# Altium PCB CAN-to-CAN.PcbDoc
Units mil, origin at the board's own origin, x right, y up, seen from the top; angles counter-clockwise.
Board outline 3270.03 x 2790.03 mil, 2 copper layers (Top Layer, Bottom Layer); 112 components, 87 nets, 366 pads, 76 vias.
Unrouted connection lines stored in the file: 33.
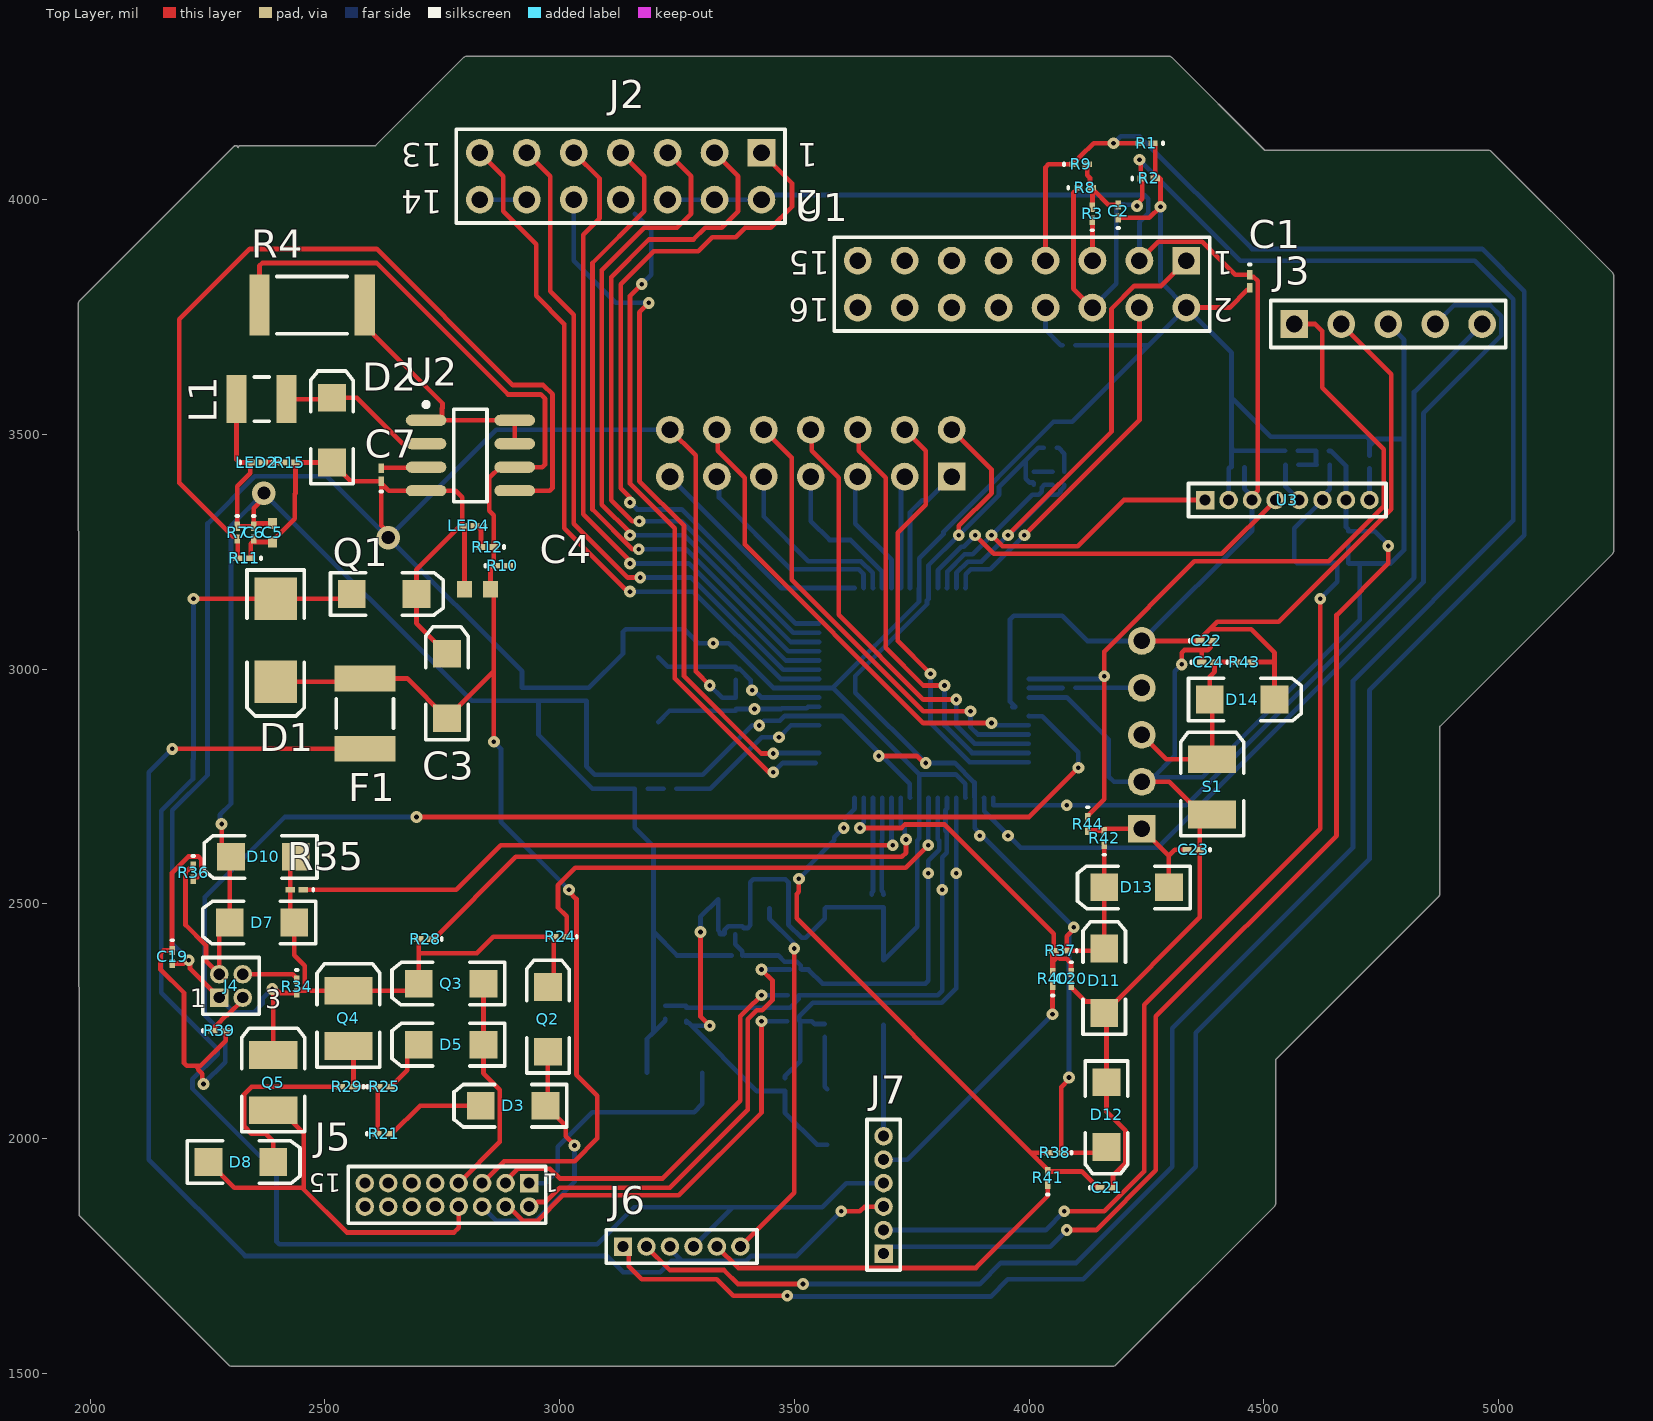
[diagram p0: Top Layer view]
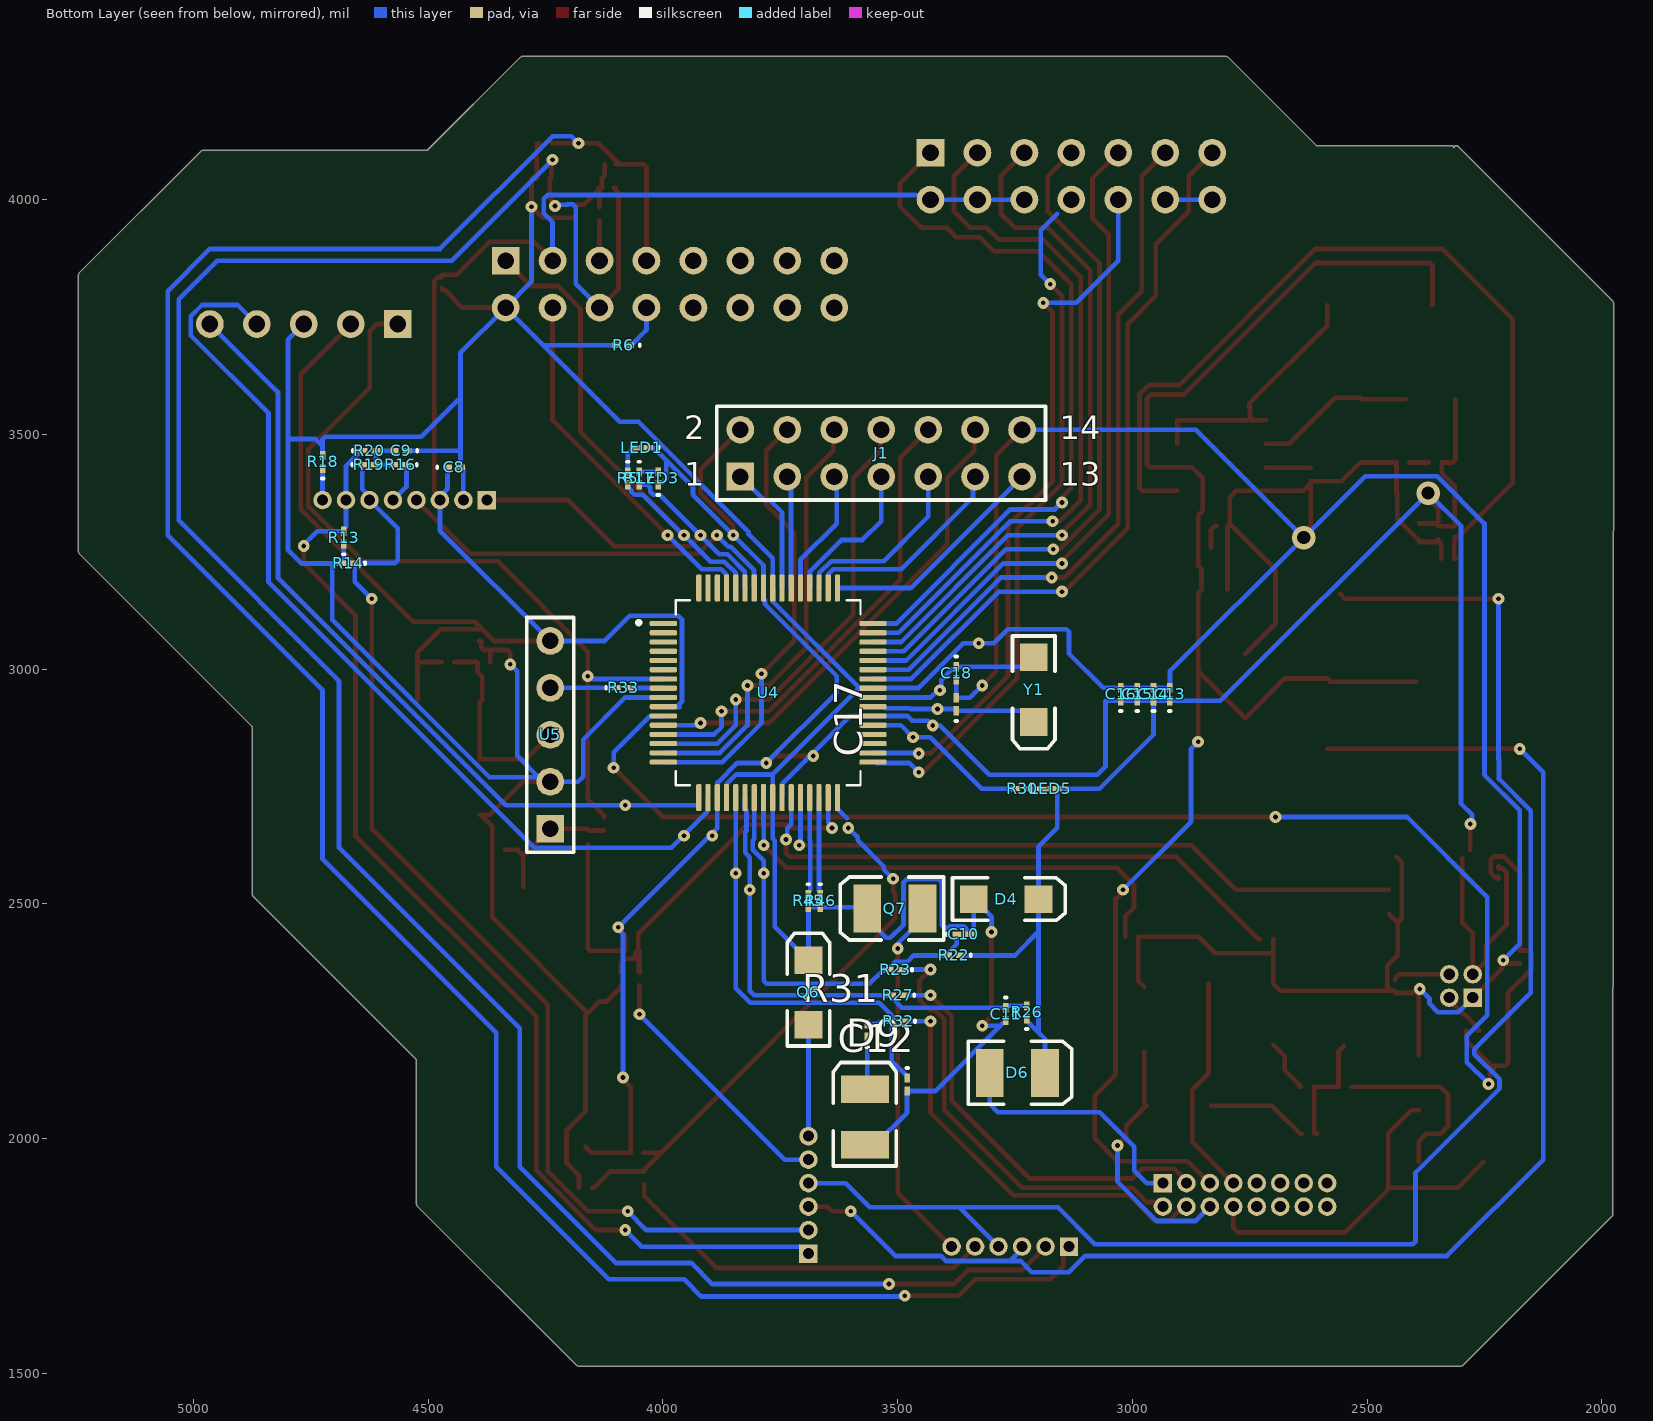
[diagram p1: Bottom Layer view, seen from below]

## Layer stack, top to bottom
Top Solder: solder mask 0.4, Solder Resist, Dk 3.5
Top Layer: signal copper 1.4
Dielectric 1: dielectric 12.6, FR-4, Dk 4.8
Bottom Layer: signal copper 1.4
Bottom Solder: solder mask 0.4, Solder Resist, Dk 3.5

## Board outline
1976.45,1836.45 2296.45,1516.45 2300,1514.98 4180,1514.98 4183.55,1516.45 4523.55,1856.45 4525.02,1860 4525.02,2167.92 4873.55,2516.45 4875.02,2520 4875.02,2877.92 5243.55,3246.45 5245.02,3250 5245.02,3840 5243.55,3843.55 4983.55,4103.55 4980,4105.02 4502.08,4105.02 4303.55,4303.55 4300,4305.02 2800,4305.02 2796.45,4303.55 2607.92,4115.02 2320,4115.02 ccw(c2320,4110) 2315,4110.39 ccw(c2310,4110) 2306.45,4113.55 1976.45,3783.55 1974.98,3780

## Design rules (kind name [scope] priority, off if disabled: settings)
Clearance [All] p1: gap=6 ignorepadtopadclearanceinfootprint=TRUE except(0: Arc-Hole Track-Hole SMDPad-Hole THPad-Hole Via-Hole Fill-Hole Poly-Hole Region-Hole Text-Hole)
PolygonConnect [All] p1: connectstyle=Relief reliefconductorwidth=10 reliefentries=4 polygonreliefangle="90 Angle" airgapwidth=10
RoutingVias [All] p1: holewidth=28 width=50 viastyle="Through Hole" minholewidth=28 minwidth=50 maxholewidth=28 maxwidth=50
SolderMaskExpansion [All] p1: expansion=4 istentingtop=FALSE
Width [All] p1: maxlimit=10 minlimit=10 preferedwidth=10
30 further rules are at their usual default settings.

## Components (designator, comment, footprint, x,y, rotation, side; value= is the part's Value field where it differs from the comment)
C1 "100n" 0603 4470,3826.22 r270 top
C2 "4n7" 0603 4190,3975 r90 top value=100n
C3 "100n" 3.2X1.6X1.1 2760,2963.9 r90 top
C4 "10u/16" 1608[0603] 2825,3170 r180 top value=470u/16
C5 "100u/6V3" 0402 2388.35,3290.32 r270 top value=470u/16
C6 "100n" 0603 2348.35,3290.63 r270 top
C7 "100p" 0603 2620,3413.78 r90 top value=100pF
C8 "100n" 0603 4445,3430 r180 bottom
C9 "4n7" 0603 4558.78,3465 r0 bottom value=100n
C10 "100n" 0603 3360,2435 r180 bottom
C11 "100n" 0603 3270,2265 r270 bottom
C12 "100n" 0603 3480,2115 r270 bottom
C13 "100n" 0603 2920,2946.22 r90 bottom
C14 "100n" 0603 2955,2946.22 r90 bottom
C15 "100n" 0603 2990,2946.22 r90 bottom
C16 "100n" 0603 3025,2946.22 r90 bottom
C17 "27p" 0603 3375,2925 r90 bottom value=100n
C18 "27p" 0603 3375,2991.22 r270 bottom value=100n
C19 "100n" 0603 2174.51,2386.71 r270 top
C20 "100n" 0603 4090,2340 r270 top
C21 "100n" 0603 4165,1895 r0 top
C22 "100n" 0603 4377.8,3060 r0 top
C23 "100n" 0603 4350,2615 r180 top
C24 "10n" 0603 4381.57,3015 r0 top value=100pF
D1 "P6SMB15A" SMB 2395,3061.42 r270 top
D2 "LL5817" 3.2X1.6X1.1 2515,3508.9 r90 top
D3 "LL4148" 3.2X1.6X1.1 2901.1,2070 r180 top
D4 "BAT54S" 3.2X1.6X1.1 3268.9,2510 r180 bottom
D5 "LL4148" 3.2X1.6X1.1 2768.9,2200 r180 top
D6 "BAT54S" 3.5X2.8X1.9 3245,2140 r180 bottom
D7 "BAT54S" 3.2X1.6X1.1 2366.1,2460 r180 top
D8 "LL4148" 3.2X1.6X1.1 2321.1,1950 r0 top
D9 "BAT54S" 3.5X2.8X1.9 3570,2045.94 r90 bottom
D10 "BAT54S" 3.2X1.6X1.1 2368.9,2600 r180 top
D11 "BAT54S" 3.2X1.6X1.1 4160,2336.1 r90 top
D12 "BAT54S" 3.2X1.6X1.1 4165,2051.1 r270 top
D13 "LL4148" 3.2X1.6X1.1 4228.9,2535 r180 top
D14 "LL4448" 3.2X1.6X1.1 4453.9,2935 r0 top
F1 "Fuse 1" 1812 2585,2905.2 r90 top
J1 "Header 7X2" HDR2X7 3835,3410 r180 bottom
J2 "Header 7X2" HDR2X7 3430,4100 r180 top
J3 "ZL201" HDR1X5 4565,3735 r0 top
J4 "MX-43045-0400" MHDR2X2 2275,2300 r0 top
J5 "MX-43045-0800" MHDR2X8 2935,1905 r180 top
J6 "MX-43045-0600" MHDR1X6 3135,1770 r0 top
J7 "MX-43045-0600" MHDR1X6 3690,1755 r90 top
L1 "DL22-330" 14-1210 2365,3575 r180 top value=100uH
LED1 "HCL-1904AYL" 0603 4045,3471.22 r0 bottom
LED2 "HCL-1903BG4" 0603 2355,3440 r0 top
LED3 "HCL-1906BR1" 0603 4010,3406.22 r90 bottom
LED4 "HCL-1904AYL" 0603 2806.22,3305 r180 top
LED5 "HCL-1906BR1" 0603 3173.78,2745 r0 bottom
Q1 "BSS138" 3.2X1.6X1.1 2626.1,3160 r0 top
Q2 "BSS123" 3.2X1.6X1.1 2975,2253.9 r90 top
Q3 "BSS123" 3.2X1.6X1.1 2768.9,2330 r180 top
Q4 "BSS123" 3.5X2.8X1.9 2550,2255.94 r90 top
Q5 "BSS123" 3.5X2.8X1.9 2390,2119.06 r90 top
Q6 "BSS123" 3.2X1.6X1.1 3690,2311.1 r90 bottom
Q7 "BSS123" 3.5X2.8X1.9 3505.94,2490 r0 bottom
R1 "CAN0001" 0603 4250,4120 r180 top
R2 "CAN0001" 0603 4255,4045 r0 top
R3 "nc" 0603 4135,3970 r90 top value=1K
R4 "1R" RESC6332 2472.8,3775 r180 top value=1K
R5 "4k7" 0603 4075,3406.22 r270 bottom value=1K
R6 "1k" 0603 4085,3690 r0 bottom value=1K
R7 "3k6 1%" 0603 2313.35,3290.63 r270 top value=1K
R8 "68" 0603 4118.78,4025 r0 top value=1K
R9 "68" 0603 4110,4075 r0 top value=1K
R10 "1M" 0603 2877.44,3220 r0 top value=1K
R11 "1k2 1%" 0603 2328.35,3235.63 r180 top value=1K
R12 "4k7" 0603 2846.22,3260 r180 top value=1K
R13 "CAN0001" 0603 4680,3280 r90 bottom
R14 "CAN0001" 0603 4670,3225 r0 bottom
R15 "1k8" 0603 2423.78,3440 r0 top value=1K
R16 "nc" 0603 4560,3435 r0 bottom value=1K
R17 "4k7" 0603 4050,3406.22 r270 bottom value=1K
R18 "1k" 0603 4725,3441.22 r90 bottom value=1K
R19 "68" 0603 4626.38,3435 r180 bottom value=1K
R20 "68" 0603 4625,3465 r180 bottom value=1K
R21 "10k" 0603 2625,2010 r0 top value=1K
R22 "10k" 0603 3380,2390 r0 bottom value=1K
R23 "1k" 0603 3505,2360 r0 bottom value=1K
R24 "4k7" 0603 3001.22,2430 r180 top value=1K
R25 "10k" 0603 2626.22,2110 r0 top value=1K
R26 "10k" 0603 3225,2268.78 r90 bottom value=1K
R27 "1k" 0603 3499.84,2305 r0 bottom value=1K
R28 "4k7" 0603 2713.78,2425 r180 top value=1K
R29 "10k" 0603 2546.97,2110 r180 top value=1K
R30 "1k8" 0603 3235,2745 r0 bottom value=1K
R31 "10k" 0603 3565,2230 r90 bottom value=1K
R32 "1k" 0603 3498.62,2250 r0 bottom value=1K
R33 "nc" 0603 4085,2960 r180 bottom value=1K
R34 "4k7" 0603 2440,2323.78 r270 top value=1K
R35 "4k7" 0603 2440,2530 r180 top value=1K
R36 "10k" 0603 2220,2566.22 r270 top value=1K
R37 "10k" 0603 4066.22,2400 r180 top value=1K
R38 "10k" 0603 4055,1970 r180 top value=1K
R39 "470" 0603 2275,2230 r0 top value=1K
R40 "1k" 0603 4050,2340 r90 top value=1K
R41 "1k" 0603 4040,1916.22 r90 top value=1K
R42 "4k7" 0603 4160,2640 r90 top value=1K
R43 "10k" 0603 4457.8,3015 r0 top value=1K
R44 "4k7" 0603 4125,2670 r270 top value=1K
R45 "4k7" 0603 3690,2506.22 r270 bottom value=1K
R46 "4k7" 0603 3665,2506.22 r270 bottom value=1K
S1 "DTSM32NB" 3.5X2.8X1.9 4390,2749.06 r90 top
U1 "MCP2551-I/SN" HDR2X8 4335,3870 r180 top
U2 "MC33063AD" SO8_N 2810,3455 r0 top
U3 "MCP2551-I/SN" MHDR1X8 4375,3360 r0 top
U4 "PIC30F5011" QFP50P1200X1200X120-64N 3775.86,2949.39 r180 bottom
U5 "MCP1320-46LT" HDR1X5 4240,2660 r90 bottom
Y1 "10MHz" 3.2X1.6X1.1 3210,2956.1 r270 bottom

## Footprints (in the part's own frame and the unit in brackets; to place one, negate y for a bottom-side part, rotate by r counter-clockwise, add the part's x,y. Pads: shape width x height; smd on the part's side, far side on the other; paste and mask are expansions set on the pad)
3.2X1.6X1.1 [mm] "SMT LED; 2 Flat Leads"
  rect 1.5x1.5 smd: 1(-1.75,0) 2(1.75,0)
  silkscreen extent -2.9,-1.15 3.2,1.15
3.5X2.8X1.9 [mm] "SM LED; 2 C-Bend Leads; Body 3.5 x 2.8 x 1.9 mm, inc leads (LxWxH typ)"
  rect 1.5x2.6 smd: 1(-1.5,0) 2(1.5,0)
  silkscreen extent -2.65,-1.7 2.95,1.7
14-1210 [mm] "Chip Resistor, Body 3.2x2.5mm, IPC High Density"
  rect 1.1x2.6 smd: 1(-1.35,0) 2(1.35,0)
  silkscreen extent -0.4,-1.2 0.4,1.2, body extent -1.68,-1.32 1.68,1.32, height 0.9
0402 [mm] "Chip Capacitor, Body 1.0x0.5mm, IPC High Density"
  rect 0.6x0.5 smd: 1(-0.5,0) 2(0.5,0)
  body extent -0.55,-0.3 0.55,0.3, height 1.3
0603 [mm] "Chip Inductor, Body 0.6x0.3mm, IPC High Density"
  rect 0.5x0.3 smd: 1(-0.35,0) 2(0.35,0)
  silkscreen extent -0.9,-0.05 -0.9,0.05, body extent -0.33,-0.18 0.33,0.18, height 0.55
1608[0603] [mm] "Chip Capacitor, Body 1.6x0.8mm, IPC High Density"
  rect 0.8x0.9 smd: 1(-0.7,0) 2(0.7,0)
  body extent -0.87,-0.48 0.87,0.48, height 1.3
1812 [mm] "Chip Capacitor, Body 4.5x3.2mm, IPC High Density"
  rect 1.4x3.3 smd: 1(-1.9,0) 2(1.9,0)
  silkscreen extent -0.8,-1.55 0.8,1.55, body extent -2.4,-1.7 2.4,1.7, height 1.4
HDR1X5 [mm] "Connector; Header; 5 Position"
  rect 1.5x1.5 hole 0.9: 1(0,0)
  round 1.5 hole 0.9: 2(2.54,0) 3(5.08,0) 4(7.62,0) 5(10.16,0)
  silkscreen extent -1.27,-1.27 11.43,1.27
HDR2X7 [mm] "Connector; Header; 7x2 Position"
  rect 1.5x1.5 hole 0.9: 1(0,0)
  round 1.5 hole 0.9: 2(0,2.54) 3(2.54,0) 4(2.54,2.54) 5(5.08,0) 6(5.08,2.54) 7(7.62,0) 8(7.62,2.54) 9(10.16,0) 10(10.16,2.54) 11(12.7,0) 12(12.7,2.54) 13(15.24,0) 14(15.24,2.54)
  silkscreen extent -1.27,-1.27 16.51,3.81
HDR2X8 [mm] "Connector; Header; 8x2 Position"
  rect 1.5x1.5 hole 0.9: 1(0,0)
  round 1.5 hole 0.9: 2(0,2.54) 3(2.54,0) 4(2.54,2.54) 5(5.08,0) 6(5.08,2.54) 7(7.62,0) 8(7.62,2.54) 9(10.16,0) 10(10.16,2.54) 11(12.7,0) 12(12.7,2.54) 13(15.24,0) 14(15.24,2.54) 15(17.78,0) 16(17.78,2.54)
  silkscreen extent -1.27,-1.27 19.05,3.81
MHDR1X6 [mm] "Connector; Header; 6 Position"
  rect 1x1 hole 0.6: 1(0,0)
  round 1 hole 0.6: 2(1.27,0) 3(2.54,0) 4(3.81,0) 5(5.08,0) 6(6.35,0)
  silkscreen extent -0.9,-0.9 7.25,0.9
MHDR1X8 [mm] "Connector; Header; 8 Position"
  rect 1x1 hole 0.6: 1(0,0)
  round 1 hole 0.6: 2(1.27,0) 3(2.54,0) 4(3.81,0) 5(5.08,0) 6(6.35,0) 7(7.62,0) 8(8.89,0)
  silkscreen extent -0.9,-0.9 9.79,0.9
MHDR2X2 [mm] "Connector; Header; 2x2 Position"
  rect 1x1 hole 0.6: 1(0,0)
  round 1 hole 0.6: 2(0,1.27) 3(1.27,0) 4(1.27,1.27)
  silkscreen extent -0.9,-0.9 2.17,2.17
MHDR2X8 [mm] "Connector; Header; 8x2 Position"
  rect 1x1 hole 0.6: 1(0,0)
  round 1 hole 0.6: 2(0,1.27) 3(1.27,0) 4(1.27,1.27) 5(2.54,0) 6(2.54,1.27) 7(3.81,0) 8(3.81,1.27) 9(5.08,0) 10(5.08,1.27) 11(6.35,0) 12(6.35,1.27) 13(7.62,0) 14(7.62,1.27) 15(8.89,0) 16(8.89,1.27)
  silkscreen extent -0.9,-0.9 9.79,2.17
QFP50P1200X1200X120-64N [mm]
  rrect50% 1.47x0.28 smd: 1(-5.67,3.75) 2(-5.67,3.25) 3(-5.67,2.75) 4(-5.67,2.25) 5(-5.67,1.75) 6(-5.67,1.25) 7(-5.67,0.75) 8(-5.67,0.25) 9(-5.67,-0.25) 10(-5.67,-0.75) 11(-5.67,-1.25) 12(-5.67,-1.75) 13(-5.67,-2.25) 14(-5.67,-2.75) 15(-5.67,-3.25) 16(-5.67,-3.75) 33(5.67,-3.75) 34(5.67,-3.25) 35(5.67,-2.75) 36(5.67,-2.25) 37(5.67,-1.75) 38(5.67,-1.25) 39(5.67,-0.75) 40(5.67,-0.25) 41(5.67,0.25) 42(5.67,0.75) 43(5.67,1.25) 44(5.67,1.75) 45(5.67,2.25) 46(5.67,2.75) 47(5.67,3.25) 48(5.67,3.75)
  rrect50% 0.28x1.47 smd: 17(-3.75,-5.67) 18(-3.25,-5.67) 19(-2.75,-5.67) 20(-2.25,-5.67) 21(-1.75,-5.67) 22(-1.25,-5.67) 23(-0.75,-5.67) 24(-0.25,-5.67) 25(0.25,-5.67) 26(0.75,-5.67) 27(1.25,-5.67) 28(1.75,-5.67) 29(2.25,-5.67) 30(2.75,-5.67) 31(3.25,-5.67) 32(3.75,-5.67) 49(3.75,5.67) 50(3.25,5.67) 51(2.75,5.67) 52(2.25,5.67) 53(1.75,5.67) 54(1.25,5.67) 55(0.75,5.67) 56(0.25,5.67) 57(-0.25,5.67) 58(-0.75,5.67) 59(-1.25,5.67) 60(-1.75,5.67) 61(-2.25,5.67) 62(-2.75,5.67) 63(-3.25,5.67) 64(-3.75,5.67)
  silkscreen extent -7.1,-5 5,5
RESC6332 [mm] "Chip Resistor, Body 6.3x3.2mm, IPC High Density"
  rect 1.1x3.3 smd: 1(-2.85,0) 2(2.85,0)
  silkscreen extent -1.9,-1.55 1.9,1.55, body extent -3.22,-1.68 3.22,1.68, height 0.9
SMB [mm] "DO-214-AA/SMB; 2 C-Bend Leads; Body 5.3 x 3.6 mm, inc. leads (LxW)"
  rect 2.3x2.3 smd: 1(-2.25,0) 2(2.25,0)
  silkscreen extent -3.8,-1.55 4.1,1.55
SO8_N [mm] "SOIC, 8-Leads, Body 4.9x3.9mm, Pitch 1.27mm, IPC Medium Density"
  oval 2.2x0.6 smd: 1(-2.4,1.905) 2(-2.4,0.635) 3(-2.4,-0.635) 4(-2.4,-1.905) 5(2.4,-1.905) 6(2.4,-0.635) 7(2.4,0.635) 8(2.4,1.905)
  silkscreen extent -2.52,-2.5 0.9,2.88, body extent -2,-2.5 2,2.5, height 1.75

## Part data
C1 C2 C3 C6 C7 C8 C9 C10 C11 C12 C13 C14 C15 C16 C17 C18 C19 C20 C21 C22 C23 C24: library part Cap, "Capacitor", LatestRevisionDate=17-Jul-2002, LatestRevisionNote="Re-released for DXP Platform.", PackageReference=RAD-0.3, Published=8-Jun-2000, Publisher="Altium Limited"
C4 C5: library part "Cap Pol1", "Polarized Capacitor (Radial)", LatestRevisionDate=17-Jul-2002, LatestRevisionNote="Re-released for DXP Platform.", PackageReference=RB7.6-15, Published=8-Jun-2000, Publisher="Altium Limited"
D1: library part "D Zener", "Zener Diode", LatestRevisionDate=17-Jul-2002, LatestRevisionNote="Re-released for DXP Platform.", PackageReference=DIODE-0.7, Published=8-Jun-2000, Publisher="Altium Limited"
D2 D3 D5 D8 D13: library part 1N4148, "High Conductance Fast Diode", Code_JEDEC=DO-204-AH, ComponentLink1Description="Manufacturer Link", ComponentLink1URL=http://www.fairchildsemi.com/, ComponentLink2Description=Datasheet, ComponentLink2URL=http://www.fairchildsemi.com/ds/1N%2F1N4148.pdf, DatasheetDocument=1997, LatestRevisionDate=17-Jul-2002, LatestRevisionNote="Re-released for DXP Platform.", PackageReference=DO-35, Published=8-Jun-2000, Publisher="Altium Limited"
D4 D6 D7 D9 D10 D11 D12: "Schottky Barrier Double Diode", ComponentLink1Description="Manufacturer Link", ComponentLink1URL=http://www.semiconductors.philips.com/, ComponentLink2Description=Datasheet, ComponentLink2URL=http://www.semiconductors.philips.com/acrobat/datasheets/BAT54_SERIES_4.pdf, DatasheetVersion=4-Mar-2002, LatestRevisionDate=12-Dec-2006, LatestRevisionNote="IPC-7351 Footprint Added.", PackageDescription="3-Pin SOT-23 Package 0.95 mm Pitch, 2.3 mm Lead Span", PackageReference=SOT23, PackageVersion=May-1999, Published=17-Sep-2003, Publisher="Altium Limited"
D14: library part Diode, "Default Diode", PackageDocument=Sep-1996, Code_JEDEC=DO-214-AB, LatestRevisionDate=17-Jul-2002, LatestRevisionNote="Re-released for DXP Platform.", PackageReference=SMC, Published=8-Jun-2000, Publisher="Altium Limited"
F1: "Fuse", LatestRevisionDate=17-Jul-2002, LatestRevisionNote="Re-released for DXP Platform.", PackageReference=PIN-W2/E2.8, Published=8-Jun-2000, Publisher="Altium Limited"
J1 J2: "Header, 7-Pin, Dual row", LatestRevisionDate=17-Jul-2002, LatestRevisionNote="Re-released for DXP Platform.", Publisher="Altium Limited"
J3: library part CON5, "Connector"
J4: library part "Header 2X2", "Header, 2-Pin, Dual row", LatestRevisionDate=17-Jul-2002, LatestRevisionNote="Re-released for DXP Platform.", Publisher="Altium Limited"
J5: library part "Header 4X2A", "Header, 4-Pin, Dual row", LatestRevisionDate=17-Jul-2002, LatestRevisionNote="Re-released for DXP Platform.", Publisher="Altium Limited"
J6 J7: library part "Header 6", "Header, 6-Pin", LatestRevisionDate=17-Jul-2002, LatestRevisionNote="Re-released for DXP Platform.", Publisher="Altium Limited"
L1: library part "Inductor Iron", "Magnetic-Core Inductor", Published=24-Mar-1999, Publisher="Altium Limited", Revision="July-2002: Re-released for DXP Platform."
LED1 LED2 LED3 LED4 LED5: library part LED3, "Typical BLUE SiC LED", Published=8-Jun-2000, Publisher="Altium Limited", Revision 1="Jul-2002: Re-released for DXP Platform.", Revision 2="17-Dec-2003: PCB Footprint replaced."
Q1: "N-Channel Enhancement Mode Vertical DMOS FET", ComponentLink1Description="Manufacturer Link", ComponentLink1URL=http://www.zetex.com/, ComponentLink2Description=Datasheet, ComponentLink2URL=www.zetex.com/3.0/pdf/BSS138.pdf, DatasheetVersion=Mar-96, PackageDescription="SOT-23; 3 Leads; Body 3.1 x 2.5 mm, inc. leads (LxW max), Alternate Lead Configuration", PackageReference=SOT23, PackageVersion=1996, Published=17-Dec-2003, Publisher="Altium Limited"
Q2 Q3 Q4 Q5 Q6 Q7: "N-channel Enhancement Mode Vertical D-MOSFET", ComponentLink1Description="Manufacturer Link", ComponentLink1URL=http://www.semiconductors.philips.com/, ComponentLink2Description=Datasheet, ComponentLink2URL=http://www.semiconductors.philips.com/acrobat/datasheets/BSS123_3.pdf, DatasheetVersion=Apr-1995, LatestRevisionDate=12-Dec-2006, LatestRevisionNote="IPC-7351 Footprint Added.", PackageDescription="3-Pin SOT-23 Package 0.95 mm Pitch, 2.3 mm Lead Span", PackageReference=SOT23, PackageVersion=May-1999, Published=17-Sep-2003, Publisher="Altium Limited"
R1 R2 R13 R14: library part "Res Varistor", "Varistor (Voltage-Sensitive Resistor)", LatestRevisionDate=04-Mar-2005, LatestRevisionNote="PCB Footprint replaced.", PackageReference=6-0805, Published=24-Mar-1999, Publisher="Altium Limited"
R3 R4 R5 R6 R7 R8 R9 R10 R11 R12 R15 R16 R17 R18 R19 R20 R21 R22 R23 R24 R25 R26 R27 R28 R29 R30 R31 R32 R33 R34 R35 R36 R37 R38 R39 R40 R41 R42 R43 R44 R45 R46: library part Res2, "Resistor", LatestRevisionDate=17-Jul-2002, LatestRevisionNote="Re-released for DXP Platform.", PackageReference=AXIAL-0.4, Published=8-Jun-2000, Publisher="Altium Limited"
S1: library part PUSHB, "Switch PushButton"
U1 U3: "High Speed CAN Transceiver, 8-Pin Plastic SOIC, Industrial Grade", Code_JEDEC=MS-012, ComponentLink1Description="Manufacturer Link", ComponentLink1URL=http://www.microchip.com, ComponentLink2Description=Datasheet, ComponentLink2URL=http://ww1.microchip.com/downloads/en/DeviceDoc/21667d.pdf, DatasheetVersion=Nov-2003, LatestRevisionDate=13-Apr-2006, LatestRevisionNote="IPC-7351 Footprint Added.", PackageDescription="8-Pin Plastic Narrow Body Small Outline Integrated Circuit 1.27 mm Pitch", PackageReference=SOIC150-8, PackageVersion=Oct-2005, Published=6-Oct-2005, Publisher="Altium Limited"
U2: "DC-to-DC Converter Control Circuit", Code_IPC=SOIC127P600-8, Code_JEDEC=MS-012-AA, ComponentLink1Description="Manufacturer Link", ComponentLink1URL=http://www.onsemi.com/site/products/taxonomy/0,4438,503,00.html, ComponentLink2Description=Datasheet, ComponentLink2URL=http://www.onsemi.com/pub/Collateral/MC34063A-D.PDF, DatasheetVersion=1988, LatestRevisionDate=13-Apr-2006, LatestRevisionNote="IPC-7351 Footprint Added.", PackageDescription="8-Pin Small Outline Integrated Circuit 1.27 mm Pitch", PackageReference=751-02, Published=17-Jul-2002, Publisher="Altium Limited"
U4: "PIC30F5011 - Up"
U5: library part MCP1320
Y1: library part XTAL, "Crystal Oscillator", LatestRevisionDate=17-Jul-2002, LatestRevisionNote="Re-released for DXP Platform.", PackageReference=R38, Published=8-Jun-2000, Publisher="Altium Limited"

## Via types
v1: diameter 25, hole 10, Top Layer to Bottom Layer, 74 vias
v2: diameter 50, hole 28, Top Layer to Bottom Layer, 2 vias

## Nets (pads, with @x,y where several pads share a name; then routed paths per layer and width w, separated by ;. In a path a pad name is that pad's centre, name@x,y a point inside that pad or via, vN(x,y) a via of type N, cw(c..) or ccw(c..) an arc to the next point about the centre after c; other vN are vias at no path point)
+5V: C1.1 C5.1 C6.1 C8.1 C13.1 C14.1 C15.1 C16.1 C22.1 D4.2 D6.2 D7.2 D9.2 D10.2 D11.2 D12.2 D13.2 D14.2 J1.2 J2.2 J2.4 J2.6 J3.2 J4.2 L1.2 LED1.1 LED2.1 LED3.1 LED5.1 R7.1 R22.1 R26.1 R31.1 R36.1 R37.1 R38.1 R42.1 R43.2 U1.3 U3.3 U4.10 U4.19 U4.26 U4.38 U4.57 U5.5 | length 11410.7
  Top Layer w10: R36.1 2220,2576.06 2219.09,2575.16 2211.41,2575.16 2203.09,2566.84 2203.09,2454.91 2246.61,2411.39 2246.61,2378.39 J4.2 2275,2437.8 D7.2 ; L1.2 2311.85,3445.86 2317.71,3440 LED2.1 2341.22,3416.89 2313.35,3389.02 R7.1 C6.1 C6.1@2348.35,3308.35 ; v2(2370,3375) 2370,3364.18 2348.35,3342.52 C6.1@2348.35,3308.35 ; C5.1 2350,3310 C6.1@2348.35,3308.35 ; v1(3680,2815) 3760.94,2815 3775.94,2800 v1(3780,2800) ; v1(4085,2130) 4085,2125.94 4068.78,2109.72 R38.1 4152.8,1970 D12.2 ; v1(4095,2450) 4095,2445.94 4080,2430.94 R37.1 4155,2400 D11.2 D13.2 R42.1 ; U1.3 4275.53,3910.53 4369.08,3910.53 4439.61,3840 C1.1 4470,3836.06 4470.91,3835.16 4478.59,3835.16 4486.91,3826.84 4486.91,3379.85 4475,3367.95 U3.3 ; U5.5 4360.27,3060 4385.27,3085 ; R43.2 4522.8,3015 ; D14.2 4522.8,3015 ; J3.2 4771.69,3628.31 4771.69,3340.66 4532.02,3101 4401.27,3101 4385.27,3085 ; 4385.27,3085 4472.8,3085 4522.8,3035 4522.8,3015
  Bottom Layer w10: v1@2283.38,2663.38 2276.5,2670.27 2276.5,2689.73 2300,2713.23 2300,3305 v2(2370,3375) 2812.56,2932.44 C13.1 C14.1 ; D6.2 3185.94,2212.01 3200,2226.06 ; R26.1 3225,2251.06 3200,2226.06 ; R22.1 3250,2390 3200,2440 ; J2.2 3439.39,4009.39 3459.77,4009.39 3460.39,4010 4245,4010 4253.5,4001.5 4253.5,3970.75 4235,3952.25 U1.3 ; R31.1 3565,2110 D9.2 ; U4.26 3745.82,2726.68 3745.82,2755.38 3601.03,2900.18 U4.38 3479.44,2900.18 3469.26,2890 3435,2890 v1(3425,2880) 3410,2880 3305,2775 3075,2775 3057.04,2792.96 3057.04,2932.44 C16.1 C15.1 C14.1 ; 3964.35,2919.35 3969.88,2919.35 ; 3969.88,2920.38 3959.16,2931.1 3959.16,3105.48 3967.21,3113.54 4070.2,3113.54 4123.74,3060 U5.5 4475,3295 U3.3 4475,3367.95 4458.78,3384.17 C8.1 ; LED3.1 4010,3396.38 4009.09,3397.28 4001.41,3397.28 3993.09,3405.6 3993.09,3445.04 ; LED1.1 4019.28,3471.22 3993.09,3445.04 ; v1(4085,2130) 4085,2435.94 4095,2445.94 v1(4095,2450) 3884.13,2660.87 U4.19 3883.62,2726.68 3883.62,2758.32 3841.95,2800 v1(3780,2800) 3630,2950 3630,2985.27 3782.53,3137.8 3782.53,3143.68 3782.53,3146.02 3785.71,3149.2 U4.57 3785.71,3220.71 v1(3850,3285) 3936.07,3371.07 3936.07,3388.02 3993.09,3445.04 ; C14.1 2955,2860 3070,2745 LED5.1 3160,2661.73 3200,2621.73 3200,2512.99 D4.2 3200,2440 ; 3200,2226.06 3200,2440
  other v1: 3895,2645 2280,2670
+12V: C3.1 C4.1 D1.2 F1.2 J5.5 R4.2 R10.1 R12.1 U2.6 | length 3272.4
  Top Layer w10: R4.2 2360.59,3859.14 2366.45,3865 2610,3865 2890,3585 2960,3585 2969,3576 2969,3435.86 2963.14,3430 2939.49,3430 2914.49,3430 U2.6 2872.99,3430 2850.18,3407.19 2850.18,3337.11 2860,3327.29 2860,3220.28 2852.56,3212.83 C4.1 2860,3162.56 2860,2995 ; D1.2 2577.83,2972.83 F1.2 2675,2980 C3.1 2860,2995 ; J5.5 2881.69,1951.69 ; v1(2860,2845) 2860,2995 ; v1@3020.64,2529.36 3020.64,2525.3 3035.84,2510.1 3035.84,2135.81 3080.36,2091.29 3080.36,2000.27 3031.78,1951.69
  Bottom Layer w10: v1(2860,2845) 2875,2830 2875,2675 v1(3020,2530)
+12VPWR: F1.1 J6.3 J7.3 | length 3028.3
  Top Layer w10: v1(2175,2830) 2584.61,2830 F1.1 ; v1(3600,1845) 3639.49,1845 3649.49,1855 J7.3
  Bottom Layer w10: v1(2175,2830) 2125,2780 2125,1955 2330,1750 3100.07,1750 3135.07,1715 3214,1715 3238.31,1739.31 3397.71,1739.31 3408.4,1750 3505,1750 v1(3600,1845)
ADC0: J1.4 U4.16 | length 592.5
  Top Layer w10: J1.4 3780,3465 3780,3350 3720,3290 3720,3060 v1(3790,2990)
ADC1: J1.6 U4.15 | length 648
  Top Layer w10: J1.6 3636.84,3508.16 3636.84,3465.47 3694.47,3407.84 3694.47,3045.53 3775,2965 v1(3820,2965)
ADC2: J1.8 U4.14 | length 744.4
  Top Layer w10: J1.8 3536.84,3508.16 3536.84,3465.47 3594.47,3407.84 3594.47,3115.53 3775,2935 v1(3845,2935)
ADC3: J1.10 U4.13 | length 840.8
  Top Layer w10: J1.10 3494.47,3450.53 3494.47,3190.53 3775,2910 v1(3875,2910)
ADC4: J1.12 U4.12 | length 952.3
  Top Layer w10: J1.12 3336.84,3508.16 3336.84,3465.47 3394.47,3407.84 3394.47,3265.53 3775,2885 v1(3920,2885)
ButD: C10.1 R22.2 R23.2 U4.23 | length 875.6
  Bottom Layer w10: C10.1 3373.78,2414.09 3388.94,2398.94 R22.2@3388.94,2390 ; R22.2 3465.91,2390 3479,2376.91 3505.62,2376.91 3513.94,2368.59 3513.94,2360.91 3514.88,2360.91 3515.79,2360 3530,2360 3560,2330 3779.14,2330 3785,2335.86 3785,2591.77 3808.5,2615.27 3808.5,2634.73 3805.39,2637.84 U4.23
  other v1: 3785,2565
ButD_IN: J5.2 R23.1 | length 949.7
  Top Layer w10: J5.2 2942.95,1855 2952.95,1865 2970,1865 3000,1895 3235,1895 3401,2061 3401,2254.23 3420.27,2273.5 3431.73,2273.5 3453.5,2295.27 3453.5,2336.5 v1(3430,2360)
  Bottom Layer w10: v1(3430,2360) R23.1
ButN: C11.1 R26.2 R27.2 U4.22 | length 1030.2
  Bottom Layer w10: R26.2 3269.09,2282.56 3270,2281.65 C11.1 3491.15,2278.78 3508.78,2296.41 3508.78,2304.09 3509.68,2305 R27.2 3805,2305 3815,2315 3815,2599.14 3824.5,2608.64 3824.5,2652.8 3821.9,2655.4 3821.9,2699.57 3825.08,2702.74 U4.22
  other v1: 3815,2530
ButN_IN: J5.3 R27.1 | length 892.4
  Top Layer w10: J5.3 2885,1909.93 2910.76,1935.69 2979.31,1935.69 3000,1915 3219.41,1915 3385,2080.59 3385,2260.86 3413.64,2289.5 3414.5,2289.5 v1(3430,2305)
  Bottom Layer w10: v1(3430,2305) R27.1
ButR: C12.1 R31.2 R32.2 U4.21 | length 967.1
  Bottom Layer w10: C12.1 3480,2132.72 3512.4,2165.12 R32.2 ; R31.2 3543.33,2243.78 3537.24,2249.86 3512.54,2249.86 R32.2 ; U4.21 3844.76,2319.76 3814,2289 3539,2289 3510.34,2260.34 3510.34,2250.91 3511.25,2250 R32.2
  other v1: 3845,2565
ButR_IN: J5.4 R32.1 | length 903.1
  Top Layer w10: J5.4 2891.61,1855 2922.29,1824.32 2951.94,1824.32 3006.63,1879 3254,1879 3430,2055 v1(3430,2250)
  Bottom Layer w10: v1(3430,2250) R32.1
CAN_BMS_RX: U3.4 U4.58 | length 851.9
  Top Layer w10: v1(3885,3285) 3924.5,3245.5 4410.5,3245.5 U3.4
  Bottom Layer w10: U4.58 3805.9,3173.13 3805.9,3210.67 3855.8,3260.56 3860.56,3260.56 v1(3885,3285)
CAN_BMS_TX: R17.2 U3.1 U4.59 | length 846.8
  Top Layer w10: v1(3920,3285) 3943.5,3261.5 4103.54,3261.5 4202.04,3360 U3.1
  Bottom Layer w10: U4.59 3825.59,3173.13 3825.59,3207.72 3862.42,3244.56 3879.56,3244.56 v1(3920,3285) 4006.6,3371.6 4020.46,3371.6 4026.91,3378.04 4026.91,3386.58 4032.76,3392.44 R17.2
CAN_BMSS_H: J7.1 R13.2 R20.1 U3.7 | length 2483.7
  Top Layer w10: v1(4080,1805) 4142.71,1805 4270,1932.29 4270,2260 4655,2645 4655,3115 4765,3225 v1(4765,3262.07)
  Bottom Layer w10: J7.1 3704.69,1769.69 4044.69,1769.69 v1(4080,1805) ; R20.1@4639.39,3464.39 R20.1 4642.72,3465 4675,3432.72 U3.7 4675,3302.72 4680,3297.72 R13.2 4736.22,3293.78 v1@4770,3260
CAN_BMSS_L: J7.2 R14.1 R19.1 U3.6 | length 2392.3
  Top Layer w10: v1(4075,1845) 4160.08,1845 4245,1929.92 4245,2285 4620,2660 v1(4620,3150)
  Bottom Layer w10: J7.2 4035,1805 v1(4075,1845) ; v1(4620,3150) 4656.22,3186.22 R14.1 ; U3.6 4565,3300 4565,3231.72 4570.86,3225.86 R14.1@4656.22,3225.86 ; U3.6@4625,3367.95 4640.16,3383.11 R19.1
CAN_MUX_RX: U1.4 U4.61 | length 775.4
  Top Layer w10: v1(3990,3285) 4235,3530 U1.4
  Bottom Layer w10: U4.61 3864.96,3173.13 3864.96,3201.84 3875.68,3212.56 3917.56,3212.56 v1(3990,3285)
CAN_MUX_TX: R5.2 U1.1 U4.60 | length 1119.5
  Top Layer w10: v1(3955,3285) 4175.53,3505.53 4175.53,3767.84 4223.81,3816.13 4281.13,3816.13 U1.1
  Bottom Layer w10: U4.60 3845.27,3173.13 3845.27,3204.78 3869.05,3228.56 3898.56,3228.56 v1(3955,3285) 3956.49,3285 4043.09,3371.6 4060.46,3371.6 4067.02,3378.16 4067.02,3380.53 4075,3388.5 R5.2
CAN_MUXED_H: J6.1 R1.2 R9.1 U1.7 | length 4573.3
  Top Layer w10: U1.7 4035,4069.14 4040.86,4075 R9.1@4091.38,4075 ; R9.1@4091.38,4075.91 R9.1@4101.06,4075.91 ; 4102.94,4085.46 4109.38,4091.91 4137.48,4120 v1(4180,4120) R1.2
  Bottom Layer w10: v1(3485,1665) 3486.55,1663.45 3918.45,1663.45 3955,1700 4115,1700 4355,1940 4355,2225 4725,2595 4725,2955 5055,3285 5055,3805 4965,3895 4475,3895 4235,4135 4195,4135 v1(4180,4120)
CAN_MUXED_L: J6.2 R2.1 R8.1 U1.6 | length 4627.5
  Top Layer w10: R8.1 4101.06,4025 4100.16,4024.09 4100.16,4020.16 4094.47,4014.47 4094.47,3810.53 U1.6 ; v1(4230,3986.5) 4230,3990.56 4241.22,4001.78 R2.1 4238.78,4045 4237.87,4045.91 4237.87,4082.13 v1(4235,4085)
  Bottom Layer w10: v1(3518.49,1690) 3895,1690 3940,1735 4100,1735 4305,1940 4305,2235 4690,2620 4690,2975 5031.53,3316.53 5031.53,3788.08 4949.61,3870 4450,3870 v1(4235,4085) ; U1.6 4185.76,3820.76 4185.76,3984.14 4191.62,3990 4202.44,3990 4203.07,3989.37 4227.13,3989.37 v1(4230,3986.5)
ChrgLED: R45.1 U4.29 | length 208.4
  Bottom Layer w10: U4.29 3687.28,2636.09 3685.92,2634.73 3685.92,2528.01 3689.09,2524.84 3689.09,2520.91 R45.1
ChrgLED_OUT: J7.6 Q6.1 | length 237.2
  Bottom Layer w10: J7.6 Q6.1
FluidHeater: R46.1 U4.30 | length 207.2
  Bottom Layer w10: R46.1 3665,2523.94 3667.6,2526.53 U4.30
FluidHeater_OUT: J6.6 Q7.1 | length 789.6
  Top Layer w10: J6.6 3500,1885 v1(3500,2405)
  Bottom Layer w10: Q7.1 3446.89,2468.35 3497.13,2418.11 3497.13,2407.87 v1(3500,2405)
GND: C1.2 C2.1 C3.2 C4.2 C5.2 C6.2 C7.1 C8.2 C9.1 C10.2 C11.2 C12.2 C13.2 C14.2 C15.2 C16.2 C17.2 C18.2 C19.2 C20.2 C21.2 C22.2 C23.1 C24.1 D2.1 D4.1 D6.1 D7.1 D9.1 D10.1 D11.1 D12.1 J1.14 J2.12 J2.14 J3.3 J4.1 J5.1 LED4.2 Q1.2 Q2.2 Q3.2 Q4.2 Q5.2 Q6.2 Q7.2 R1.1 R2.2 R6.2 R11.1 R13.1 R14.2 R15.2 R18.2 R24.2 R28.2 R34.2 R35.2 R45.2 R46.2 S1.1 U1.2 U2.4 U3.2 U4.9 U4.20 U4.25 U4.41 U4.56 U5.2 | length 15562.4
  Top Layer w10: C19.2 2198.87,2372.93 2205.94,2380 v1(2210,2380) 2212.87,2377.13 2212.87,2362.13 J4.1 ; R11.1 2342.13,3266.69 C6.2@2348.35,3272.91 ; C6.2 C6.2@2348.35,3272.91 ; v1(2387.82,2318.68) 2391.32,2318.68 v1@2395,2315 ; Q5.2 2390,2305.94 2395,2310.94 v1@2395,2315 ; R35.2 2426.22,2468.78 D7.1 ; v2(2635,3280) 2635,3290.82 2620,3305.82 C7.1@2620,3396.06 ; R28.2 2700,2395 ; C3.2 2695,3097.8 Q1.2 2695,3211.5 2788.5,3305 LED4.2 ; C4.2 2797.44,3303.94 2796.38,3305 LED4.2 ; Q2.2 2987.44,2335.24 R24.2 2858.8,2430 2823.8,2395 2700,2395 ; J1.14 3290,3455 3290,2995 v1(3320,2965) ; C20.2 4090,2322.28 4120.55,2291.73 4135.47,2291.73 D11.1 ; C21.2 4178.78,1921.37 4205.53,1948.12 4205.53,2016.29 4165,2056.82 D12.1 4165,2262.2 D11.1 ; C2.1 4256.22,3961.22 v1(4280,3985) 4280,4043.78 4275.75,4048.03 4272.72,4045 R2.2 4268.78,4050 4268.78,4113.62 4268.62,4113.77 4268.62,4119.09 4267.72,4120 R1.1 ; U5.2@4241.84,2761.84 U5.2 4298.35,2760 4368.35,2690 S1.1@4388.31,2690 ; 4325,3034.58 4330.86,3040.44 4367.8,3040.44 C24.1 ; U1.2 4427.56,3770 4465.16,3807.6 4469.09,3807.6 4470,3808.5 C1.2 ; 4368.08,3040.44 4380.87,3040.44 4386.73,3046.3 4386.73,3059.09 4387.64,3060 C22.2 ; S1.1 S1.1@4388.31,2690 ; C6.2@2348.35,3272.91 2350.63,3270.63 C5.2 2388.35,3272.6 2435.91,3320.16 2435.91,3372.87 2437.56,3374.53 R15.2 D2.1 2555,3400 C7.1 C7.1@2620,3396.06 ; v1@2395,2315 2399.06,2315 2404.06,2310 R34.2 2440,2313.94 2441.06,2315 2448.75,2315 ; D7.1 2452.44,2477.44 D7.1 ; D7.1 2435,2390.27 2456.91,2368.36 2456.91,2323.16 2448.75,2315 ; 2448.75,2315 Q4.2 2685,2315 Q3.2 2700,2395 ; C7.1@2620,3396.06 2636.06,3380 U2.4 2725.51,3380 2750.51,3380 2778.32,3380 2792.44,3365.88 LED4.2 ; D11.1 4363.78,2470.98 C23.1 4363.78,2665.47 S1.1@4388.31,2690
  Bottom Layer w10: v1(2210,2380) 2175,2415 2175,2699.37 2250,2774.37 2250,3310 2351,3411 2504,3411 v2(2635,3280) ; J4.1 2305.69,2269.31 2349.06,2269.31 2367,2287.26 2367,2297.87 v1(2387.82,2318.68) ; J5.1 2969.69,1905 2995.9,1931.22 2995.9,1982.28 3069.85,2056.22 3286.46,2056.22 3304.06,2073.82 D6.1 ; J1.14 2865,3510 v2(2635,3280) ; C11.2 3270,2247.28 3270.91,2246.38 3274.84,2246.38 3420,2101.22 C12.2 3480,2055.24 3548.35,1986.89 D9.1 ; v1@3317.48,2967.52 v1(3320,2965) 3346.22,2938.78 C17.2 C18.2 ; D4.1 3337.8,2443.43 3341.38,2439.84 3341.38,2435.91 3342.28,2435 C10.2 3350.16,2435 3351.06,2435.91 3351.06,2443.59 3359.38,2451.91 3388.72,2451.91 3392.22,2448.4 3400.5,2448.4 3406.36,2454.26 3406.36,2545.74 3412.81,2552.18 3480.97,2552.18 3487.42,2545.74 3487.42,2455.82 3515.8,2427.43 3524.09,2427.43 3565,2468.35 Q7.2 3567.44,2492.44 R46.2 R45.2 Q6.2 3761.5,2451.5 3761.5,2634.73 3766.02,2639.26 U4.25 3766.02,2775.58 ; U4.20 3863.94,2726.68 3863.94,2755.38 3843.74,2775.58 3766.02,2775.58 ; U4.9 4080.45,2939.55 4170,2850 4170,2770.86 4180.86,2760 U5.2 4249.39,2769.39 4369.39,2769.39 4704.62,3104.62 4704.62,3225 ; R6.2 4255,3690 ; v1(4280,3985) 4280,3825 U1.2 ; U3.2 4425,3427.72 4427.28,3430 C8.2 4431.22,3465 4431.22,3470 ; C9.1 4436.22,3465 4431.22,3470 ; R13.1 4680,3225.91 4680.91,3225 R14.2 4704.62,3225 ; R18.2 4725,3475 ; J3.3 4798.77,3701.23 4798.77,3490 ; v2(2635,3280) 2920,2995 C13.2 C14.2 C15.2 C16.2 3062.33,2960 3135,3032.67 3135,3079.14 3140.86,3085 3265,3085 3295,3055 3360,3055 3455.25,2959.75 3552.12,2959.75 U4.41 3553.15,2959.75 3581.85,2959.75 ; 3581.85,2959.75 3766.02,2775.58 ; 3581.85,2959.75 3765.51,3143.4 3765.51,3172.11 U4.56 3766.02,3236.02 3817.87,3287.87 3817.87,3292.44 4051.96,3526.53 4091.53,3526.53 4255,3690 ; 4255,3690 U1.2 ; U1.2 4431.22,3673.78 4431.22,3575 ; 4431.22,3470 4431.22,3575 ; 4431.22,3575 4435,3575 4515,3495 4719.14,3495 4725,3489.14 4725,3475 ; 4704.62,3225 4770,3225 4798.77,3253.77 4798.77,3490 ; 4725,3475 4740,3490 4798.77,3490
  other v1: 4325,3010 3327.5,3055
GPIOC13: J2.3 U4.47
GPIOC14: J2.1 U4.48
GPIOD0: J2.5 U4.46
GPIOD1: J1.13 U4.49 | length 491.6
  Bottom Layer w10: J1.13 3472.38,3172.62 U4.49
GPIOD2: J1.11 U4.50 | length 451.4
  Bottom Layer w10: J1.11 3339.64,3405.36 3339.64,3365.47 3492.56,3212.56 3636.68,3212.56 3647.4,3201.84 3647.4,3173.13 U4.50
GPIOD3: J1.9 U4.51 | length 399.3
  Bottom Layer w10: J1.9 3435,3325 3530,3230 3641.87,3230 3667.08,3204.78 3667.08,3173.13 U4.51
GPIOD4: J1.7 U4.52 | length 326.5
  Bottom Layer w10: J1.7 3535,3315 3575,3275 3619.49,3275 3686.77,3207.72 3686.77,3173.13 U4.52
GPIOD5: J1.5 U4.53 | length 271.3
  Bottom Layer w10: J1.5 3630,3405 3630,3310 3706.97,3233.03 U4.53
GPIOD6: J1.3 U4.54 | length 240.8
  Bottom Layer w10: U4.54 3727.16,3173.13 3727.16,3402.16 J1.3
GPIOD7: J1.1 U4.55 | length 281.3
  Bottom Layer w10: U4.55 3746.34,3333.66 3772.24,3359.57 3784.57,3359.57 J1.1
GPIOD8: J2.13 U4.42
GPIOD9: J2.11 U4.43
GPIOD10: J2.9 U4.44
GPIOD11: J2.7 U4.45
GROUND: D1.1 J6.4 J7.4 Q1.1 | length 3352.4
  Top Layer w10: v1(2220,3150) D1.1 2547.2,3150 Q1.1
  Bottom Layer w10: v1(2220,3150) 2220,2808.23 2219.06,2807.29 2219.06,2766.06 2151.5,2698.5 2151.5,2310.27 2271.52,2190.25 2271.52,2179.75 2217.81,2126.05 2217.81,2106.58 2396.73,1927.66 2396.73,1780.86 2402.59,1775 3080,1775 3158.4,1853.4 3368.4,1853.4 ; J6.4 3368.4,1853.4 ; J7.4 3611.02,1905 3559.43,1853.4 3368.4,1853.4
ILUM: J4.4 R34.1 | length 122.5
  Top Layer w10: J4.4 2431.5,2350 2440,2341.5 R34.1
IMP: C19.1 R36.2 R39.2 U4.11 | length 3340.7
  Top Layer w10: R36.2 2220,2556.38 2220.91,2557.28 2228.59,2557.28 2236.91,2565.6 2236.91,2594.4 2230.46,2600.84 2209.54,2600.84 2174.51,2565.81 C19.1 2155.86,2400.49 2150,2394.63 2150,2360 2200,2310 2200,2160.86 2205.86,2155 2225,2155 ; v1(2241.31,2116.31) 2238.44,2119.18 2238.44,2138.02 2230,2146.46 2230,2150 2225,2155 ; R39.2 2288.78,2208.78 2235,2155 2230,2155 2225,2155 ; v1(2695,2685) 4000,2685 v1(4105,2790)
  Bottom Layer w10: v1(2241.31,2116.31) 2287.52,2162.52 2287.52,2219.17 2244.31,2262.38 2244.31,2514.31 2415,2685 v1(2695,2685) ; U4.11 3999.6,2899.67 4028.31,2899.67 4105,2822.98 v1(4105,2790)
IMP_IN: J4.3 R39.1 | length 100.2
  Top Layer w10: R39.1 2265.16,2230 2266.06,2230.91 2266.06,2238.59 2290.74,2263.27 2293.19,2263.27 2325,2295.07 J4.3
IsFHerror: C21.1 R38.2 R41.2 U4.32 | length 1209.7
  Top Layer w10: v1(3509.67,2553.28) 3509.67,2525.45 3505,2520.78 3505,2468.94 4003.94,1970 ; R38.2 4003.94,1970 ; C21.1 4147.28,1895 4112.28,1930 R41.2 4040,1933.94 4003.94,1970
  Bottom Layer w10: v1(3509.67,2553.28) 3529.46,2573.06 3529.46,2579.46 3585.27,2635.27 3585.27,2641.77 v1(3605,2661.5) ; 3607.87,2682.38 3628.23,2702.74 U4.32
IsFHerror_IN: J6.5 R41.1 | length 812.3
  Top Layer w10: J6.5 3380.69,1724.31 3886.72,1724.31 4040,1877.6 R41.1
IsHeating: C20.1 R37.2 R40.2 U4.31 | length 766.5
  Top Layer w10: v1(3640,2661.5) 3728.15,2661.5 3735.65,2669 3819.75,2669 4052.44,2436.3 4052.44,2400.91 4051.81,2400.91 4050,2399.09 R40.2 4050.91,2354.69 4050.91,2376.91 4057.09,2383.09 4057.09,2389.54 ; R37.2@4059.16,2396.78 4059.16,2389.54 4065.6,2383.09 4079.72,2383.09 4089.09,2373.72 4089.09,2354.68 C20.1
  Bottom Layer w10: v1(3640,2661.5) 3640,2665.56 3647.91,2673.47 U4.31
IsHeating_IN: J7.5 R40.1 | length 549.6
  Top Layer w10: v1(4050,2265) R40.1
  Bottom Layer w10: J7.5 3740,1955 v1(4050,2265)
LightD: R24.1 U4.24 | length 1042.7
  Top Layer w10: R24.1 3015,2473.65 2996.5,2492.15 2996.5,2539.73 3033.54,2576.78 3736.78,2576.78 v1(3785,2625)
  Bottom Layer w10: v1(3785,2625) 3785,2666.98 3785.71,2667.69 U4.24
LightD_OUT: D3.1 J5.6 Q2.1 | length 548.7
  Top Layer w10: Q2.1 2975,2075 D3.1 2994.53,2045.47 3013.17,2026.83 3013.17,2005.2 3031.86,1986.51 v1(3031.86,1985)
  Bottom Layer w10: J5.6 2865.69,1824.31 2947.71,1824.31 3031.86,1908.46 v1(3031.86,1985)
LightN: R28.1 U4.27 | length 1208.6
  Top Layer w10: R28.1 2731.5,2425 2906.5,2600 3729.04,2600 3738.01,2608.97 v1(3738.01,2636.99)
  Bottom Layer w10: U4.27 3726.65,2669.49 3735.14,2661 3735.14,2639.86 v1(3738.01,2636.99)
LightN_OUT: D5.1 J5.7 Q3.1 | length 475.8
  Top Layer w10: J5.7 2872.73,1992.73 2872.73,2104.08 2837.8,2139.02 D5.1 Q3.1
LightR: R35.1 U4.28 | length 1397.2
  Top Layer w10: R35.1 2780,2530 2875,2625 v1(3709.42,2625)
  Bottom Layer w10: U4.28 3706.97,2627.46 v1(3709.42,2625)
LightR_OUT: D8.1 J5.8 Q5.1 | length 848.9
  Top Layer w10: D8.1 2307.2,1895 2451.44,1895 2455,1891.44 ; Q5.1 2406,2060 2455,2011 2455,1895 2455,1891.44 ; J5.8 2785,1810 2775,1800 2546.44,1800 2455,1891.44
MCLR: J3.1 R44.1 U4.7 | length 1748.3
  Top Layer w10: R44.1 4125,2687.72 4160,2722.72 v1(4160,2985) 4160,3037.31 4352.19,3229.5 4637.89,3229.5 4755.69,3347.29 4755.69,3468.07 4624.47,3599.28 4624.47,3720.06 4609.53,3735 J3.1
  Bottom Layer w10: U4.7 4149.86,2978.92 4155.94,2985 v1(4160,2985)
NetC2_2: C2.2 R3.2 R8.2 R9.2 | length 170.9
  Top Layer w10: R9.2 4123.78,4051.97 4129.84,4045.91 4129.84,4025.91 4130.75,4025 R8.2 R8.2@4134.09,4025 ; R3.2 4135,4024.09 R8.2@4134.09,4025 ; C2.2 4169.09,3988.78 4137.4,4020.47 4137.4,4024.09 4136.5,4025 R8.2@4134.09,4025
NetC7_2: C7.2 U2.3 | length 96.7
  Top Layer w10: C7.2 2620,3427.87 2620.91,3428.78 2714.29,3428.78 U2.3
NetC9_2: C9.2 R16.2 R19.2 R20.2 | length 107.9
  Bottom Layer w10: C9.2 R20.2 4611.22,3435.91 R19.2@4612.13,3435 ; R16.2 R19.2@4612.13,3435 ; R19.2 R19.2@4612.13,3435
NetC17_1: C17.1 U4.39 Y1.2 | length 357.9
  Bottom Layer w10: Y1.2 3234.02,2911.22 C17.1 3375,2914.25 3375.91,2915.16 3471.79,2915.16 3473.32,2916.69 3526.04,2916.69 3529.21,2919.87 U4.39
  other v1: 3415,2915
NetC18_1: C18.1 U4.40 Y1.1 | length 391.3
  Bottom Layer w10: Y1.1 3230,3005 C18.1 3375,3001.06 3375.91,3000.16 3383.59,3000.16 3407.13,2976.61 3407.13,2957.87 v1(3410,2955) 3414.06,2955 3429.51,2939.55 U4.40
NetC24_2: C24.2 D14.1 R43.1 S1.2 U5.3 | length 261.9
  Top Layer w10: S1.2 4390,2930 D14.1 4385,2984.06 4395.04,2994.09 4395.04,3014.68 C24.2 R43.1
NetD2_2: D2.2 L1.1 U2.2 | length 339
  Top Layer w10: L1.1 2512.2,3575 D2.2 2568.2,3577.8 2666,3480 U2.2
NetD3_2: D3.2 R21.2 | length 218.3
  Top Layer w10: R21.2 2642.72,2010 2702.72,2070 D3.2
NetD5_2: D5.2 R25.2 | length 117.2
  Top Layer w10: R25.2 2643.94,2110 2644.84,2110.91 2644.84,2114.84 2675.47,2145.47 2675.47,2175.47 D5.2
NetD8_2: D8.2 R29.2 | length 399.8
  Top Layer w10: D8.2 2390,1994.53 2374.31,2010.22 2343.51,2010.22 2327.82,2025.92 2327.82,2094.08 2343.74,2110 R29.2
NetLED1_2: LED1.2 R5.1 | length 60.2
  Bottom Layer w10: LED1.2 4062.72,3471.22 4075,3458.94 R5.1
NetLED2_2: LED2.2 R15.1 | length 41.2
  Top Layer w10: LED2.2 R15.1
NetLED3_2: LED3.2 R17.1 | length 40
  Bottom Layer w10: LED3.2 R17.1
NetLED4_1: LED4.1 R12.2 | length 52.5
  Top Layer w10: LED4.1 2823.94,3305 2832.44,3296.5 R12.2
NetLED5_2: LED5.2 R30.1 | length 33.7
  Bottom Layer w10: LED5.2 R30.1
NetQ1_3: R10.2
NetQ4_1: Q4.1 R21.1 R25.1 R29.1 | length 248.9
  Top Layer w10: Q4.1 2560.75,2186.14 R29.1 R25.1 2612.44,2010.91 2611.54,2010 R21.1 2607.28,2010 R21.1@2606.38,2010.91
NetR3_1: R3.1 U1.5 | length 86.2
  Top Layer w10: U1.5 R3.1
NetR4_1: R4.1 U2.1 U2.7 U2.8 | length 555.5
  Top Layer w10: R4.1 2585,3731.69 2750.51,3566.18 2750.51,3556.18 2749.61,3555.28 2749.61,3536.29 U2.1@2743.32,3530 ; U2.1 U2.1@2743.32,3530 ; U2.7 U2.8 U2.1@2743.32,3530
NetR6_1: R6.1 U1.8 | length 97.3
  Bottom Layer w10: U1.8 4035,3722.28 4067.28,3690 R6.1
NetR7_2: R7.2 R11.2 U2.5 | length 1837
  Top Layer w10: R11.2@2310.63,3235.63 R11.2 2314.57,3271.69 2313.35,3272.91 R7.2 2313.35,3280.79 2312.44,3281.69 2304.76,3281.69 2190,3396.45 2190,3745 2340,3895 2610,3895 2900,3605 2965,3605 2985,3585 2985,3385.86 2979.14,3380 2939.49,3380 2914.49,3380 U2.5
NetR16_1: R16.1 U3.5 | length 86.9
  Bottom Layer w10: R16.1 4546.22,3388.78 U3.5
NetR18_1: R18.1 U3.8 | length 67.4
  Bottom Layer w10: U3.8 R18.1
NetR30_2: R30.2 U4.37 | length 360.5
  Bottom Layer w10: R30.2@3249.03,2745.25 R30.2 3321,2745 3431,2855 v1(3467.36,2855) 3492.85,2880.5 3552.14,2880.5 3552.39,2880.25 U4.37
NetR33_2: R33.2 U4.8 | length 72.4
  Bottom Layer w10: U4.8 3999.47,2959.62 4070.84,2959.62 R33.2
PGC: J3.5 U4.17 | length 1713.3
  Bottom Layer w10: U4.17 3923.5,2710.51 3924.01,2710 4335,2710 4820,3195 4820,3590 J3.5
  other v1: 4080,2710
PGD: J3.4 U4.18 | length 2033.7
  Bottom Layer w10: U4.18 3904.33,2725.65 3904.33,2696.95 3981.8,2619.47 4274.08,2619.47 4840,3185.39 4840,3545 5005.53,3710.53 5005.53,3751.79 4981.79,3775.53 4905.53,3775.53 J3.4
  other v1: 3955,2645
RESET: C23.2 D13.1 R42.2 R44.2 U5.1 | length 309.6
  Top Layer w10: R44.2 4159.09,2656.22 4159.09,2656.81 4162.28,2660 U5.1 4297.8,2602.2 ; D13.1 4297.8,2602.2 ; C23.2 4310.59,2615 4297.8,2602.2
RX: J2.10 U4.34
TX: J2.8 U4.33
WDI: R33.1 U5.4 | length 141.2
  Bottom Layer w10: R33.1 U5.4
pads on no net: J5.9 J5.10 J5.11 J5.12 J5.13 J5.14 J5.15 J5.16 U1.9 U1.10 U1.11 U1.12 U1.13 U1.14 U1.15 U1.16 U4.1 U4.2 U4.3 U4.4 U4.5 U4.6 U4.35 U4.36 U4.62 U4.63 U4.64
copper on no net: | length 17215.9
  Top Layer w10: 2280,2614.41 2280,2670 ; 2297.2,2460 2297.2,2597.2 ; 2426.22,2530 2426.22,2588.43 2437.8,2600 ; 2830,4100 2880,4050 2880,3975 2950,3905 2950,3795 3010,3735 3010,3300 3145,3165 v1(3150,3165) ; 2881.69,1951.69 3031.78,1951.69 ; 2930,4100 2980,4050 2980,3970 2980,3805 3030,3755 3030,3310 3145,3195 v1(3171.66,3195) ; 3030,4100 3085,4045 3085,3960 3050,3925 3050,3850 3050,3330 3150,3230 v1(3150,3225) ; 3130,4100 3180,4050 3180,3975 3070,3865 3070,3845 3070,3340 3155,3255 v1(3168.62,3255) ; 3145,1770 3135,1770 3147.5,1757.5 3147.5,1727.5 3175,1700 3335,1700 3370,1665 3485,1665 ; v1(3150,3285) 3150,3290 3090,3350 3090,3840 3090,3850 3180,3940 3250,3940 3280,3970 3280,4050 3230,4100 ; v1(3150,3355) 3150,3365 3130,3385 3130,3820 3200,3890 3295,3890 3325,3920 3375,3920 3395,3940 3450,3940 3495,3985 3495,4035 3430,4100 ; v1(3169.9,3315) 3155,3315 3110,3360 3110,3820 3110,3835 3190,3915 3285,3915 3310,3940 3345,3940 3380,3975 3380,4050 3330,4100 ; v1(3175,3820) 3150,3795 3150,3665.94 3150,3654.04 3150,3395 3245,3300 3245,2980 3445,2780 v1(3455,2780) ; 3185,1770 3235,1720 3275,1720 3350,1720 3380,1690 3518.49,1690 ; v1(3190,3780) 3170,3760 3170,3594.04 3170,3400 3265,3305 3265,2985 3430,2820 v1(3455,2820) ; v1(3300,2440) 3300,2260 v1(3320,2240) ; 3835,3510 3920,3425 3920,3375 3850,3305 3850,3285 ; 4096.22,4079.84 4101.84,4085.46 4102.94,4085.46 ; 4240,2860 4291.89,2808.11 4390,2808.11 ; 4325,3010 4325,3034.58
  Bottom Layer w10: 2830,4000 2930,4000 ; 3030,4000 3030,3870 3120,3780 v1(3190,3780) ; v1(3150,3165) 3173.32,3165 3285,3165 3471.08,2978.92 3552.64,2978.92 ; v1(3150,3225) 3170.45,3225 3275,3225 3481.71,3018.29 3552.64,3018.29 ; v1(3150,3285) 3169.01,3285 3265,3285 3492.34,3057.66 3552.64,3057.66 ; v1(3150,3355) 3165,3340 3165.17,3340 3260,3340 3502.97,3097.03 3552.64,3097.03 ; 3160,3970 3195,3935 3195,3840 v1(3175,3820) ; v1(3168.62,3255) 3270,3255 3487.02,3037.98 3552.64,3037.98 ; v1(3169.9,3315) 3260,3315 3497.65,3077.35 3502.65,3077.35 3552.64,3077.35 ; v1(3171.66,3195) 3280,3195 3476.39,2998.61 3552.64,2998.61 ; 3230,4000 3330,4000 3430,4000 ; 3235,1770 3235,1765 3260,1740 ; 3270,2251.22 3281.22,2240 v1(3320,2240) ; v1(3300,2440) 3300,2472.2 3337.8,2510 ; v1(3455,2780) 3475,2800 3545,2800 ; v1(3455,2820) 3456.44,2821.44 3552.64,2821.44 ; 3790,2990 3790,2885 3873.24,2801.76 3999.09,2801.76 ; 3820,2965 3820,2880 3878.56,2821.44 3999.09,2821.44 ; 3845,2935 3845,2880 3883.87,2841.13 3999.09,2841.13 ; 3875,2910 3875,2876.62 3890.81,2860.81 3924.19,2860.81 3999.09,2860.81 ; 3920,2885 3924.5,2880.5 3999.09,2880.5 ; 4244.69,2764.69 4259.69,2764.69 4310,2815 4310,2995 4325,3010

## Silkscreen, mask and mechanical layers (free items; w line width, h text height)
Mechanical 1:
  lines w10: 1980,1840 2300,1520 4110,1520 4180,1520 4520,1860 4520,2170 4870,2520 4870,2880 5240,3250 5240,3840 4980,4100 4500,4100 4300,4300 2800,4300 2610,4110 2320,4110 2310,4110 1980,3780 1980,1840

## Text inside footprints (layer, text, board x,y; h text height)
J1: Bottom Overlay "2" at 3955,3490 h50; Bottom Overlay "1" at 3955,3390 h50; Bottom Overlay "14" at 3155,3490 h50; Bottom Overlay "13" at 3155,3390 h50
J2: Top Overlay "13" at 2750,4120 h50 r180; Top Overlay "14" at 2750,4020 h50 r180; Top Overlay "1" at 3550,4120 h50 r180; Top Overlay "2" at 3550,4020 h50 r180
J4: Top Overlay "3" at 2373.43,2277.26 h39.37; Top Overlay "1" at 2212.01,2280 h39.37
J5: Top Overlay "15" at 2535,1925 h39.37 r180; Top Overlay "1" at 2997.99,1925 h39.37 r180
U1: Top Overlay "2" at 4435,3790 h50 r180; Top Overlay "1" at 4435,3890 h50 r180; Top Overlay "15" at 3575,3890 h50 r180; Top Overlay "16" at 3575,3790 h50 r180